# Altium PCB aou_pcb.PcbDoc
Units mm, origin at the board's own origin, x right, y up, seen from the top; angles counter-clockwise.
Board outline 58 x 60 mm, 2 copper layers (Top Layer, Bottom Layer); 57 components, 35 nets, 211 pads, 148 vias.
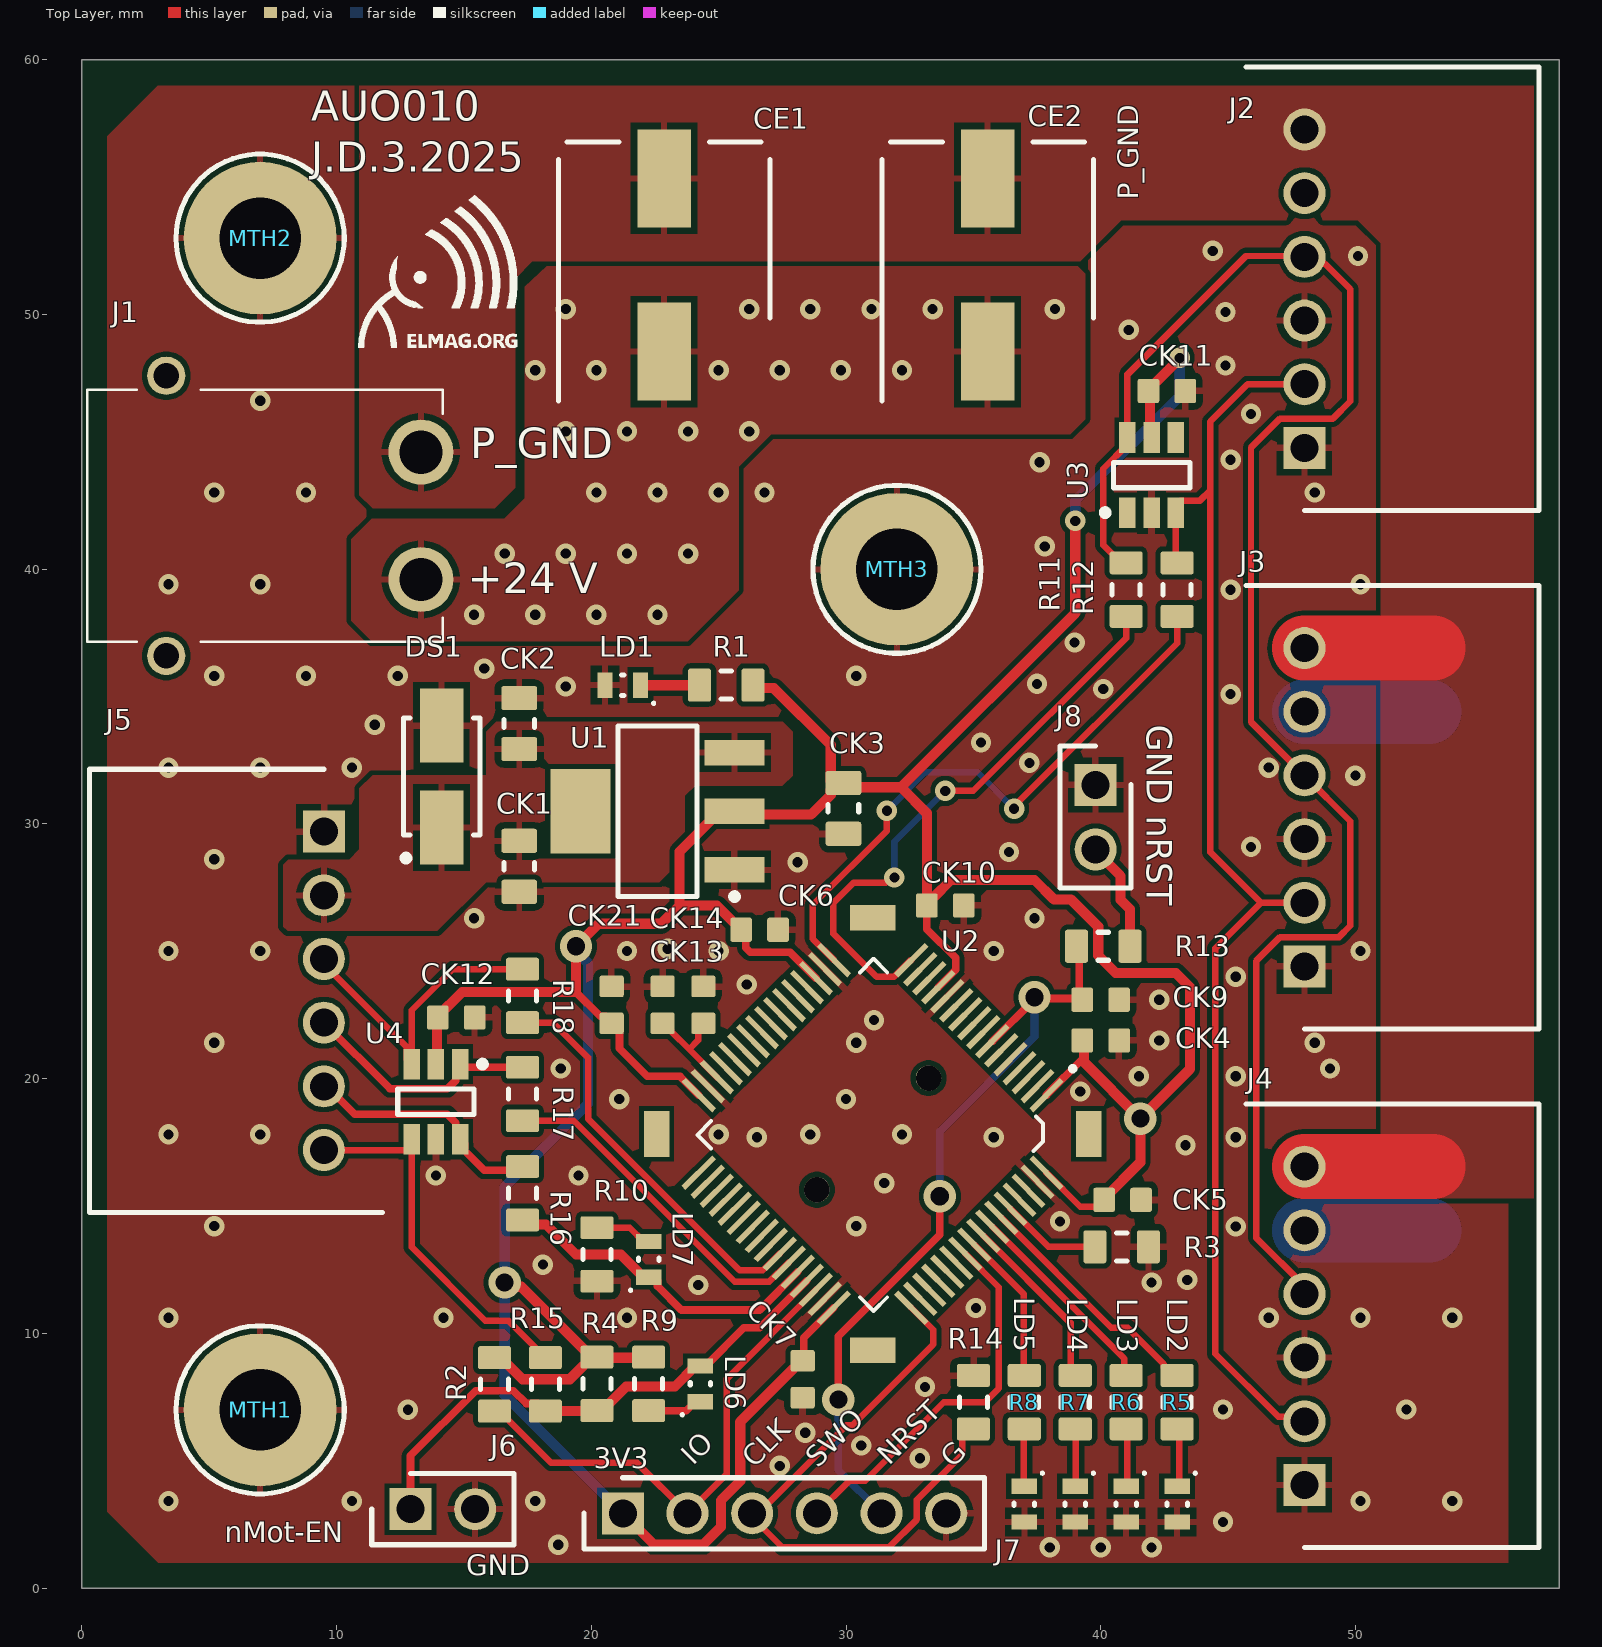
[diagram p0: Top Layer view]
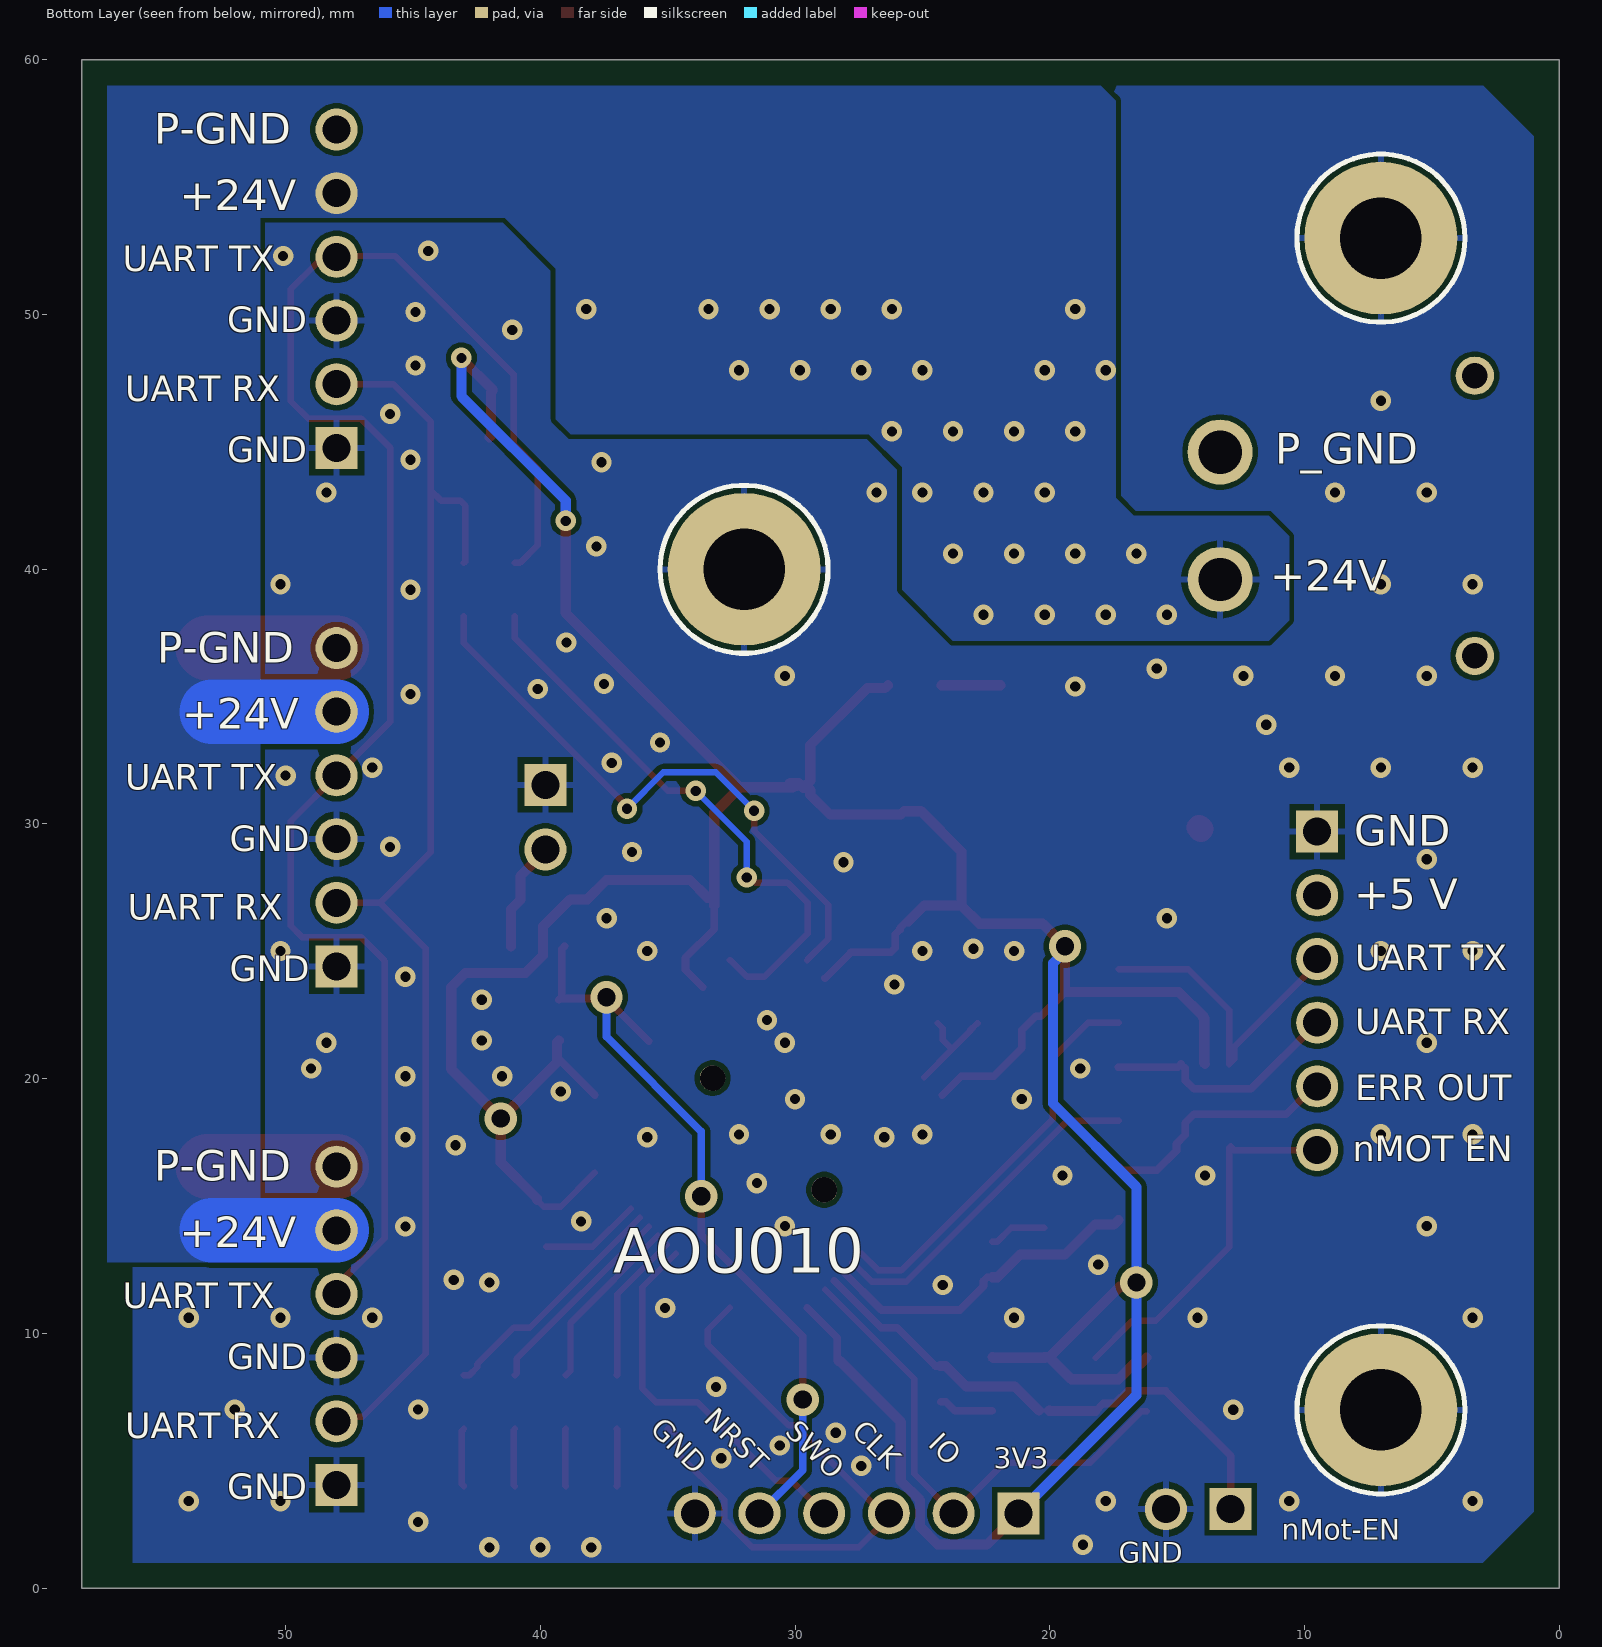
[diagram p1: Bottom Layer view, seen from below]

## Layer stack, top to bottom
Top Solder: solder mask 0.0102, Solder Resist, Dk 3.5
Top Layer: signal copper 0.0356
Dielectric 1: dielectric 0.32, FR-4, Dk 4.8
Bottom Layer: signal copper 0.0356
Bottom Solder: solder mask 0.0102, Solder Resist, Dk 3.5

## Board outline
0,0 0,60 58,60 58,0

## Design rules (kind name [scope] priority, off if disabled: settings)
BoardOutlineClearance [All] p1: gap=1 ignorepadtopadclearanceinfootprint=FALSE
Clearance [All] p1: gap=0.2 ignorepadtopadclearanceinfootprint=FALSE
HoleSize [All] p1: absolutevalues=TRUE maxlimit=4 minlimit=0.025 maxpercent=80.000 minpercent=20.000
PolygonConnect [All] p1: connectstyle=Relief reliefconductorwidth=0.254 reliefentries=4 polygonreliefangle="90 Angle" airgapwidth=0.254
RoutingVias [All] p1: holewidth=0.4 width=0.8 viastyle="Through Hole" minholewidth=0.35 minwidth=0.7 maxholewidth=2 maxwidth=4
SolderMaskExpansion [All] p1: expansion=0.102 istentingtop=FALSE
SupplyNets "Schematic Supply Nets_4" [InNet('P_GND')] p1: voltage=0.000
SupplyNets "Schematic Supply Nets_3" [InNet('+24V')] p2: voltage=0.000
SupplyNets "Schematic Supply Nets_2" [InNet('3V3')] p3: voltage=0.000
SupplyNets "Schematic Supply Nets_1" [InNet('+5')] p4: voltage=0.000
SupplyNets "Schematic Supply Nets" [InNet('GND')] p5: voltage=0.000
Width [All] p1: maxlimit=2.54 minlimit=0.254 preferedwidth=0.254
29 further rules are at their usual default settings.

## Components (designator, comment, footprint, x,y, rotation, side; value= is the part's Value field where it differs from the comment)
CE1 "100u" CAPAE830X1100N 22.86,51.943 r90 top
CE2 "100u" CAPAE830X1100N 35.56,51.943 r90 top
CK1 "10u" CAP0805 17.172,28.339 r270 top
CK2 "10u" CAP0805 17.172,33.943 r90 top
CK3 "10u" CAP0805 29.9,30.615 r270 top
CK4 "100n" CAP0603 40,21.5 r0 top
CK5 "100n" CAP0603 40.858,15.244 r0 top
CK6 "100n" CAP0603 26.607,25.849 r0 top
CK7 "100n" CAP0603 28.3,8.2 r270 top
CK9 "2u2" CAP0603 40,23.1 r0 top
CK10 "100n" CAP0603 33.9,26.8 r0 top
CK11 "100n" CAP0603 42.6,47 r0 top
CK12 "100n" CAP0603 14.7,22.4 r0 top
CK13 "2u2" CAP0603 24.4,22.9 r90 top
CK14 "2u2" CAP0603 22.8,22.9 r270 top
CK21 "100n" CAP0603 20.8,22.9 r90 top
DS1 "B230A" DIOM4326X23M 14.124,31.863 r90 top
J1 "XT30PW-M" XT30PWM 7.4,42.1 r90 top
J2 "JST-XH-6" JST-XH-6 53,51.015 r270 top
J3 "JST-XH-6" JST-XH-6 53,30.657 r270 top
J4 "JST-XH-6" JST-XH-6 53,10.3 r270 top
J5 "JST-XH-6" JST-XH-6 4.5,23.45 r90 top
J6 "Header 2p" "Pin header 2p" 12.9,3.1 r0 top
J7 "Header 6p" "Pin header 6p" 21.236,2.939 r0 top
J8 "Header 2p" "Pin header 2p" 39.8,31.54 r270 top
LD1 "G" 0603_LED_G 21.236,35.451 r180 top
LD2 "Y" 0603_LED_Y 43,3.3 r270 top
LD3 "B" 0603_LED_B 41,3.3 r270 top
LD4 "G" 0603_LED_G 39,3.3 r270 top
LD5 "R" 0603_LED_R 37,3.3 r270 top
LD6 "G" 0603_LED_G 24.284,8.019 r90 top
LD7 "R" 0603_LED_R 22.252,12.907 r90 top
MTH1 "Hole" "3.2/6 MM" 7,7 r0 top
MTH2 "Hole" "3.2/6 MM" 7,53 r0 top
MTH3 "Hole" "3.2/6 MM" 32,40 r0 top
R1 "1k" RESC2012X06N(SMR0805) 25.3,35.451 r180 top
R2 "10k" RESC2012X06N(SMR0805) 16.2,8 r90 top
R3 "10k" RESC2012X06N(SMR0805) 40.822,13.4 r180 top
R4 "10k" RESC2012X06N(SMR0805) 20.22,8.019 r90 top
R5 "1k" RESC2012X06N(SMR0805) 43,7.3 r270 top
R6 "1k" RESC2012X06N(SMR0805) 41,7.3 r270 top
R7 "1k" RESC2012X06N(SMR0805) 39,7.3 r270 top
R8 "1k" RESC2012X06N(SMR0805) 37,7.3 r270 top
R9 "1k" RESC2012X06N(SMR0805) 22.252,8.019 r270 top
R10 "1k" RESC2012X06N(SMR0805) 20.22,13.099 r270 top
R11 "100R" RESC2012X06N(SMR0805) 41,39.2 r90 top
R12 "100R" RESC2012X06N(SMR0805) 43,39.2 r90 top
R13 "100R" RESC2012X06N(SMR0805) 40.1,25.2 r0 top
R14 "10k" RESC2012X06N(SMR0805) 35,7.3 r270 top
R15 "100R" RESC2012X06N(SMR0805) 18.2,8 r270 top
R16 "100R" RESC2012X06N(SMR0805) 17.3,15.5 r270 top
R17 "100R" RESC2012X06N(SMR0805) 17.3,19.4 r270 top
R18 "100R" RESC2012X06N(SMR0805) 17.3,23.25 r270 top
U1 "AMS1117-3.3" SOT230P700X180-4M 22.6,30.5 r180 top
U2 "STM32F401RCT6" LQFP64 31.048,17.831 r135 top locked
U3 "USBLC6-4SC6" SOT23-6 42,43.7 r90 top
U4 "USBLC6-4SC6" SOT23-6 13.9,19.1 r270 top

## Footprints (in the part's own frame and the unit in brackets; to place one, negate y for a bottom-side part, rotate by r counter-clockwise, add the part's x,y. Pads: shape width x height; smd on the part's side, far side on the other; paste and mask are expansions set on the pad)
"3.2/6 MM" [mm]
  round 6 hole 3.2 mask+0.1: 1(0,0)
  silkscreen extent -3.3,-3.3 3.3,3.3, body extent -3,-3 3,3, height 0.1
0603_LED_B [mm] "Chip Diode, 2-Leads, Body 1,60x0,80mm, IPC Low Density"
  rect 0.6x1 smd: 1(-0.7,0) 2(0.7,0)
  silkscreen extent -1.26,-0.4 0.05,0.76, body extent -0.8,-0.4 0.8,0.4, height 0.8
0603_LED_G [mm] "Chip Diode, 2-Leads, Body 1,60x0,80mm, IPC Low Density"
  rect 0.6x1 smd: 1(-0.7,0) 2(0.7,0)
  silkscreen extent -1.26,-0.4 0.05,0.76, body extent -0.8,-0.4 0.8,0.4, height 0.8
0603_LED_R [mm] "Chip Diode, 2-Leads, Body 1,60x0,80mm, IPC Low Density"
  rect 0.6x1 smd: 1(-0.7,0) 2(0.7,0)
  silkscreen extent -1.26,-0.4 0.05,0.76, body extent -0.8,-0.4 0.8,0.4, height 0.8
0603_LED_Y [mm] "Chip Diode, 2-Leads, Body 1,60x0,80mm, IPC Low Density"
  rect 0.6x1 smd: 1(-0.7,0) 2(0.7,0)
  silkscreen extent -1.26,-0.4 0.05,0.76, body extent -0.8,-0.4 0.8,0.4, height 0.8
CAP0603 [mm]
  rrect20% 0.85x0.95 smd: 1(-0.725,0) 2(0.725,0)
  body extent -0.85,-0.45 0.85,0.45, height 0.9
CAP0805 [mm]
  rrect20% 0.95x1.4 smd: 1(-1,0) 2(1,0)
  silkscreen extent -0.15,-0.6 0.15,0.6, body extent -1.05,-0.67 1.05,0.67, height 1.45
CAPAE830X1100N [mm]
  rect 3.85x2.1 smd: 1(-3.4,0) 2(3.4,0)
  silkscreen extent -5.33,-4.15 4.83,4.15, body extent -4.6,-4.25 4.6,4.25, height 11
DIOM4326X23M [mm] "Molded Diode, 2-Leads, Body 4,30x2,61mm, IPC Low Density"
  rect 2.9x1.7 smd: 1(-2,0) 2(2,0)
  silkscreen extent -3.32,-1.5 2.3,1.52, body extent -2.52,-1.46 2.52,1.46, height 2.3
JST-XH-6 [mm]
  rect 1.65x1.65 hole 1.1: 1(6.25,-5)
  round 1.65 hole 1.1: 2(3.75,-5) 3(1.25,-5) 4(-1.25,-5) 5(-3.75,-5) 6(-6.25,-5)
  silkscreen extent -8.7,-7.3 8.7,4.2, body extent -10.02,-5.9 9.98,4.3, height 6
LQFP64 [mm]
  rect 1x1.8 smd rot 135: 0(-6,6) 0(6,-6)
  rect 1x1.8 smd rot 45: 0(-6,-6) 0(6,6)
  round 1 hole 1 unplated: 0(0,3.1) 0(0,-3.1)
  rect 0.22x1.7 smd: 1(-3.747,-5.901) 2(-3.247,-5.901) 3(-2.747,-5.901) 4(-2.247,-5.901) 5(-1.747,-5.901) 6(-1.247,-5.901) 7(-0.747,-5.901) 8(-0.247,-5.901) 9(0.253,-5.901) 10(0.753,-5.901) 11(1.253,-5.901) 12(1.753,-5.901) 13(2.253,-5.901) 14(2.753,-5.901) 15(3.253,-5.901) 16(3.753,-5.901) 33(3.753,5.902) 34(3.253,5.902) 35(2.753,5.902) 36(2.253,5.902) 37(1.753,5.902) 38(1.253,5.902) 39(0.753,5.902) 40(0.253,5.902) 41(-0.247,5.902) 42(-0.747,5.902) 43(-1.247,5.902) 44(-1.747,5.902) 45(-2.247,5.902) 46(-2.747,5.902) 47(-3.247,5.902) 48(-3.746,5.901)
  rect 1.7x0.22 smd: 17(5.901,-3.753) 18(5.901,-3.253) 19(5.901,-2.753) 20(5.901,-2.253) 21(5.901,-1.753) 22(5.901,-1.253) 23(5.901,-0.753) 24(5.901,-0.253) 25(5.901,0.247) 26(5.901,0.747) 27(5.901,1.247) 28(5.901,1.747) 29(5.901,2.247) 30(5.901,2.747) 31(5.901,3.247) 32(5.901,3.747) 49(-5.902,3.753) 50(-5.902,3.253) 51(-5.902,2.753) 52(-5.902,2.253) 53(-5.902,1.753) 54(-5.902,1.253) 55(-5.902,0.753) 56(-5.902,0.253) 57(-5.902,-0.247) 58(-5.902,-0.747) 59(-5.902,-1.247) 60(-5.902,-1.747) 61(-5.902,-2.247) 62(-5.902,-2.746) 63(-5.902,-3.246) 64(-5.902,-3.746)
  silkscreen extent -4.94,-7.42 4.84,4.89, body extent -6.07,-6.07 6.07,6.07, height 1.6
"Pin header 2p" [mm]
  rect 1.65x1.65 hole 1.1: 1(0,0)
  round 1.65 hole 1.1: 2(2.54,0)
  silkscreen extent -1.52,-1.4 4.06,1.4, body extent -1.27,-1.27 3.81,1.27, height 8.61
"Pin header 6p" [mm]
  rect 1.65x1.65 hole 1.1: 1(0,0)
  round 1.65 hole 1.1: 2(2.54,0) 3(5.08,0) 4(7.62,0) 5(10.16,0) 6(12.7,0)
  silkscreen extent -1.52,-1.4 14.2,1.4, body extent -1.27,-1.27 13.97,1.27, height 8.89
RESC2012X06N(SMR0805) [mm] "Chip Resistor, 2-Leads, Body 2,00x1,25mm, IPC Medium Density"
  rrect20% 0.9x1.3 smd: 1(-1.05,0) 2(1.05,0)
  silkscreen extent -0.2,-0.55 0.2,0.55, body extent -1.1,-0.7 1.1,0.7, height 0.6
SOT23-6 [mm] "SOT23, 6-Leads, Body 2,90x2,80mm, Pitch 0,95mm, IPC Low Density"
  rect 1.2x0.65 smd: 1(-1.475,0.95) 2(-1.475,0) 3(-1.475,-0.95) 4(1.475,-0.95) 5(1.475,0) 6(1.475,0.95)
  silkscreen extent -1.6,-1.5 0.5,1.95, body extent -1.6,-1.5 1.6,1.5, height 1.45
SOT230P700X180-4M [mm] "SOT223, 4-Leads, Body 6,50x7,00mm (avg), Pitch 2,30mm, IPC Low Density"
  rect 2.35x1 smd: 1(-3.025,2.3) 2(-3.025,0) 3(-3.025,-2.3)
  rect 2.35x3.3 smd: 4(3.025,0)
  silkscreen extent -3.15,-3.35 1.55,3.47, body extent -3.5,-3.35 3.5,3.35, height 1.8
XT30PWM [mm]
  round 2.55 hole 1.7: 1(2.5,-5.912) 2(-2.5,-5.912)
  round 1.5 hole 1: 3(5.5,4.088) 4(-5.5,4.088)
  silkscreen extent -4.95,-6.76 4.95,7.19, body extent -6.65,-6.71 6.65,7.24, height 5.06

## Part data
CE1 CE2: library part "Cap el 100u 50V", "100uF 50V ±20% SMD,D8xL10.2mm Aluminum Electrolytic Capacitors - SMD ROHS", JLCPCB Part=C3352, Voltage rating=50V, Basic=No, TME Part=CK1H107M08010VR
CK1 CK2 CK3: library part "Cap 10u 0805", "25V 10uF X5R ±10% 0805 Multilayer Ceramic Capacitors MLCC - SMD/SMT ROHS", JLCPCB Part=C15850, Voltage rating=25V, Basic=Yes
CK4 CK5 CK6 CK7 CK10 CK11 CK12 CK21: library part "Cap 100n 0603", "50V 100nF X7R ±10% 0603 Multilayer Ceramic Capacitors MLCC - SMD/SMT ROHS", JLCPCB Part=C14663, Voltage rating=50V, Basic=Yes
CK9 CK13 CK14: library part "Cap 2u2 0603", "16V 2.2uF X5R ±10% 0603 Multilayer Ceramic Capacitors MLCC - SMD/SMT ROHS", JLCPCB Part=C23630, Voltage rating=16V, Basic=Yes
DS1: library part B230A-13-F, "30V 500mV@2A 2A SMA(DO-214AC) Schottky Diodes ROHS", JLCPCB Part=C12889
J1: library part "XT30 male", "plug", Current=15A, JLCPCB Part=C431092, Basic=No, ComponentLink1Description="New link", ComponentLink1URL=https://www.tme.eu/cz/details/xt30pw-m/konektory-dc/amass/
J2 J3 J4 J5: library part JST-HX-6, "1x6P 6P XH Tin 6 -25℃~+85℃ 3A 1 2.5mm Brass Bend insert Push-Pull,P=2.5mm Wire To Board Connector ROHS; S6B-XH-A(LF)(SN)", JLCPCB Part=C157919
J6 J8: library part "Pin header 2p", "Connector", JLCPCB Part=C492401, Manufacturer_Name=Connfly, Manufacturer_Part_Number=DS1021-1*2SF11-B, Basic=No, Datasheet Link=https://www.tme.com/Document/cc301e58a5da78cb543a94b5a5b7f06a/DS1021.pdf, Height=5.88mm
J7: library part "Pin header 6p", "3A Direct Insert Policy 6P -40℃~+105℃ 2.54mm Single Row Black Brass 1x6P Plugin,P=2.54mm Pin Headers ROHS", JLCPCB Part=C37208, Manufacturer_Name=Connfly, Manufacturer_Part_Number=DS1021-1*2SF11-B, Datasheet Link=https://www.tme.com/Document/cc301e58a5da78cb543a94b5a5b7f06a/DS1021.pdf, Height=5.88mm
LD1 LD4 LD6: library part "LED G 0603", "0603 Green Led", JLCPCB Part=C22371297
LD2: library part "LED Y 0603", "0603 Yellow Led", JLCPCB Part=C7496811
LD3: library part "LED B 0603", "0603 Blue Led", JLCPCB Part=C7496819
LD5 LD7: library part "LED R 0603", "-40℃~+85℃ Red 0603 LED Indication - Discrete ROHS", JLCPCB Part=C2286
MTH1 MTH2 MTH3: "Universal mounting hole plated"
R1 R5 R6 R7 R8 R9 R10: library part "Res 1k 0805", "125mW Thick Film Resistors 150V ±100ppm/℃ ±1% 1kΩ 0805 Chip Resistor - Surface Mount ROHS", JLCPCB Part=C17513, Package=0805, Tolerance & Rating=1%/0.1W, Author=JP/27.03.2014, Basic=Yes, ComponentLink3Description="rezistor čip", ComponentLink3URL=heliosgreen://v1/hegMT/5-MT/Classes(343)/Folders/OpenForm?RecordNumbers=[381513], SMD=1
R2 R3 R4 R14: library part "Res 10k 0805", "125mW Thick Film Resistors 150V ±100ppm/℃ ±1% 10kΩ 0805 Chip Resistor - Surface Mount ROHS", JLCPCB Part=C17414, Package=0805, Tolerance & Rating=1%/0.1W, Basic=Yes, ComponentLink3Description="rezistor čip", ComponentLink3URL=heliosgreen://v1/hegMT/5-MT/Classes(343)/Folders/OpenForm?RecordNumbers=[381513], SMD=1
R11 R12 R13 R15 R16 R17 R18: library part "Res 100R 0805", "125mW Thick Film Resistors 150V ±100ppm/℃ ±1% 100Ω 0805 Chip Resistor - Surface Mount ROHS", JLCPCB Part=C17408, Package=0805, Tolerance & Rating=1%/0.1W, Author=JP/27.03.2014, Basic=Yes, ComponentLink3Description="rezistor čip", ComponentLink3URL=heliosgreen://v1/hegMT/5-MT/Classes(343)/Folders/OpenForm?RecordNumbers=[381513], SMD=1
U1: "72dB@(120Hz) 1A Fixed 3.3V Positive electrode SOT-223 Voltage Regulators - Linear, Low Drop Out (LDO) Regulators ROHS", JLCPCB Part=C6186, Basic=Yes
U2: "256KB 1.7V~3.6V ARM-M4 64KB 84MHz FLASH 50 LQFP-64(10x10) Microcontrollers (MCU/MPU/SOC) ROHS", JLCPCB Part=C74524, Basic=No
U3 U4: "5A 17V 6V Unidirectional 5.25V SOT-23-6 ESD and Surge Protection (TVS/ESD) ROHS", JLCPCB Part=C111212, Basic=No

## Via types
v1: diameter 0.8, hole 0.4, Top Layer to Bottom Layer, 142 vias
v2: diameter 1.27, hole 0.711, Top Layer to Bottom Layer, 6 vias

## Nets (pads, with @x,y where several pads share a name; then routed paths per layer and width w, separated by ;. In a path a pad name is that pad's centre, name@x,y a point inside that pad or via, vN(x,y) a via of type N, cw(c..) or ccw(c..) an arc to the next point about the centre after c; other vN are vias at no path point)
3V3: CK3.1 CK4.1 CK5.1 CK6.1 CK7.1 CK10.1 CK11.1 CK12.1 CK21.1 J7.1 R1.1 R2.2 R4.2 R9.1 U1.2 U2.1 U2.13 U2.19 U2.32 U2.48 U2.64 U3.5 U4.2 | length 163.9
  Top Layer w0.254: U2.64 39.199,14.978 39.866,14.978 CK5.1
  Top Layer w0.3: 19.4,23.4 20.35,22.45 20.556,22.45 21.106,21.9 21.106,21.194 22.2,20.1 23.481,20.1 U2.32 ; CK6.1@25.557,26.174 25.607,26.174 25.882,25.899 CK6.1 26.066,25.665 26.066,25.147 26.242,24.971 27.802,24.971 U2.19 ; CK7.1@28.348,8.925 28.348,9.833 U2.48 ; CK10.1 33.175,25.875 34.303,24.747 34.303,24.273 U2.13 ; U2.1 37.87,19.36 39.307,20.797
  Top Layer w0.4: U4.2 13.938,20.613 13.938,22.363 CK12.1 13.975,22.45 14.925,23.4 19.4,23.4 v2(19.4,25.2) 20.281,26.081 22.751,26.081 23.466,26.796 ; R2.2 16.45,8.8 16.7,8.8 17.3,8.2 19.151,8.2 R4.2@20.02,9.069 ; v2(16.6,12) 16.766,11.834 17.255,11.834 R4.2@20.02,9.069 ; R4.2@20.22,9.044 22.227,9.044 R9.1 ; R4.2 R4.2@20.02,9.069 ; J7.1 22.461,1.714 24.399,1.714 25.091,2.406 25.091,3.446 25.851,4.206 25.851,6.526 28.25,8.925 CK7.1 ; CK6.1@25.557,26.174 24.935,26.796 23.466,26.796 ; R1.1 26.467,35.334 27.166,35.334 29.4,33.1 29.4,31.69 CK3.1@29.675,31.415 ; CK3.1 29.875,31.615 CK3.1@29.675,31.415 ; CK3.1@30.076,31.439 32.161,31.439 ; CK10.1 33.175,30.425 32.161,31.439 ; CK10.1@33.428,27.103 34.125,27.8 37.4,27.8 38.161,27.039 38.824,27.039 39.9,25.963 39.9,24.837 40.587,24.15 42.95,24.15 43.5,23.6 43.5,20.377 v2(41.556,18.433) ; v1(39,41.9) 39,38.278 32.161,31.439 ; CK4.1 39.294,21.481 39.307,21.481 39.349,21.439 39.349,20.64 v2(41.556,18.433) ; CK5.1 40.133,15.294 41.556,16.718 v2(41.556,18.433) ; U3.5 41.937,45.237 41.937,46.938 CK11.1 41.875,47.05 43.1,48.275 v1(43.1,48.3) ; 23.466,26.796 23.466,28.915 25.05,30.5 U1.2 25.725,30.5 25.854,30.371 28.631,30.371 29.4,31.14 29.4,31.34 29.475,31.415 CK3.1@29.675,31.415
  Top Layer w0.5: CK3.1@29.95,31.55 CK3.1@30.175,31.55
  Bottom Layer w0.4: v2(19.4,25.2) 19.4,25.006 19.875,24.531 19.875,19.027 16.6,15.752 v2(16.6,12) 16.6,7.575 J7.1 ; v1(39,41.9) 39,42.7 43.1,46.8 v1(43.1,48.3)
+5: CK1.1 CK2.1 DS1.1 J5.2 U1.3 | length 0.1
  Top Layer w1: DS1.1@14.064,29.803 DS1.1
+24V: CE1.1 CE2.1 J1.2 J2.5 J3.5 J4.5 | length 9.8
  Bottom Layer w2.54: J4.5 52.893,14.05 ; J3.5 52.893,34.407
  other v1: 15.4,38.215 17.8,38.215 20.2,38.215 22.6,38.215 16.6,40.615 19,40.615 21.4,40.615 23.8,40.615 20.2,43.015 22.6,43.015 25,43.015 19,45.415 21.4,45.415 23.8,45.415 26.2,45.415 17.8,47.815 20.2,47.815 25,47.815 27.4,47.815 29.8,47.815 32.2,47.815 19,50.215 26.2,50.215 28.6,50.215 31,50.215 33.4,50.215 38.2,50.215
\M\O\T\O\R\_\E\N\A\B\L\E\: J6.1 LD6.2 R4.1 R15.2 U2.45 | length 20.8
  Top Layer w0.3: J6.1 12.9,5.192 15.458,7.75 16.942,7.75 17.442,7.25 17.9,7.25 R15.2 ; LD6.2 24.484,8.719 25.99,10.225 26.619,10.225 U2.45
  Top Layer w0.4: R15.2 18.21,6.96 20.011,6.96 R4.1@20.02,6.969 ; R4.1@20.42,6.969 21.37,7.919 23.284,7.919 24.084,8.719 LD6.2
ERR_OUT: LD7.1 R16.2 U2.44 | length 13
  Top Layer w0.3: LD7.1 22.452,12.207 22.602,12.057 22.602,11.857 23.54,10.919 26.606,10.919 U2.44
  Top Layer w0.4: R16.2 17.473,14.277 18.223,14.277 19.401,13.099 21.16,13.099 22.052,12.207 LD7.1
GND: CK1.2 CK2.2 CK3.2 CK4.2 CK5.2 CK6.2 CK7.2 CK9.2 CK10.2 CK11.2 CK12.2 CK13.2 CK14.1 CK21.2 DS1.2 J2.1 J2.3 J3.1 J3.3 J4.1 J4.3 J5.1 J6.2 J7.6 J8.1 LD1.2 LD2.2 LD3.2 LD4.2 LD5.2 MTH1.1 MTH2.1 MTH3.1 R3.1 R10.2 R14.1 U1.1 U2.12 U2.18 U2.31 U2.47 U2.63 U3.2 U4.5
  other v1: 38,1.6 40,1.6 42,1.6 18.7,1.7 44.8,2.6 3.4,3.415 10.6,3.415 17.8,3.415 50.2,3.415 53.8,3.415 27.4,4.8 32.9,5.1 30.6,5.6 28.4,6.1 12.8,7 44.8,7.015 52,7.015 33.1,7.9 3.4,10.615 14.2,10.615 21.4,10.615 46.6,10.615 50.2,10.615 53.8,10.615 35.1,11 24.2,11.9 42,12 43.4,12.1 18.1,12.7 45.3,14.2 5.2,14.215 30.4,14.215 38.4,14.4 31.5,15.9 13.9,16.2 19.5,16.2 43.327,17.386 26.5,17.7 35.8,17.7 45.3,17.7 3.4,17.815 7,17.815 25,17.815 28.6,17.815 32.2,17.815 21.1,19.2 30,19.2 39.2,19.5 41.5,20.1 45.3,20.1 18.8,20.4 49,20.4 5.2,21.415 30.4,21.415 48.4,21.415 42.3,21.5 31.1,22.3 42.3,23.1 26.1,23.7 45.3,24 3.4,25.015 7,25.015 21.4,25.015 25,25.015 35.8,25.015 50.2,25.015 23,25.1 15.4,26.3 37.4,26.3 28.1,28.5 5.2,28.615 36.4,28.9 45.9,29.1 50,31.9 3.4,32.215 7,32.215 10.6,32.215 46.6,32.215 37.2,32.4 35.3,33.2 11.5,33.9 45.1,35.1 40.1,35.3 19,35.4 37.5,35.5 5.2,35.815 8.8,35.815 12.4,35.815 30.4,35.815 15.8,36.1 38.976,37.124 45.1,39.2 3.4,39.415 7,39.415 50.2,39.415 37.8,40.9 5.2,43.015 8.8,43.015 26.8,43.015 48.4,43.015 37.6,44.2 45.1,44.3 45.9,46.1 7,46.615 44.9,48 41.1,49.4 44.9,50.1 50.1,52.3 44.4,52.5
MCU_NRST: CK9.1 J7.5 R13.1 U2.7 | length 30.7
  Top Layer w0.3: v2(29.7,7.4) 29.7,9.893 33.682,13.875 v2(33.682,15.385) ; U2.7 37.4,23.127 v2(37.4,23.2) 37.45,23.15 39.225,23.15 CK9.1 39.162,23.212 39.162,25.088 R13.1
  Bottom Layer w0.3: v2(29.7,7.4) 29.7,4.635 J7.5 ; v2(33.682,15.385) 33.682,17.925 37.4,21.643 v2(37.4,23.2)
MCU_SWO: J7.4 U2.55 | length 15
  Top Layer w0.254: J7.4 30.136,4.219 30.751,4.219 33.832,7.3 35.46,7.3 36,7.84 36,11.813 U2.55
NetCK13_1: CK13.1 CK14.2 U2.30 | length 4.3
  Top Layer w0.254: CK14.2@22.82,22.175 22.85,22.175 23.148,21.877 23.148,21.847 23.841,21.154 ; CK13.1 24.205,21.98 24.205,21.518 23.841,21.154 ; U2.30 23.841,21.154
NetJ2_2: J2.2 J3.2 J4.2 R12.2 U3.3 | length 52.6
  Top Layer w0.254: R12.2 42.95,40.3 U3.3 42.95,42.5 43.148,42.698 43.898,42.698 44.3,43.1 ; J4.2 47.826,6.724 46.976,6.724 44.5,9.2 44.5,25.115 46.293,26.907 ; J3.2 46.293,26.907 ; J2.2 45.765,47.265 44.3,45.8 44.3,43.1 ; 44.3,43.1 44.3,28.9 46.293,26.907
NetJ2_4: J2.4 J3.4 J4.4 R11.2 U3.6 | length 67.1
  Top Layer w0.254: R11.2 40.8,40.25 40.1,40.95 40.1,43.95 41.05,44.9 U3.6 41.05,47.65 45.7,52.3 47.965,52.3 J2.4 48.267,51.998 48.802,51.998 49.8,51 49.8,46.6 49.117,45.917 47.04,45.917 45.9,44.777 45.9,34.007 J3.4 49.8,30.107 49.8,26 49.359,25.559 47.04,25.559 46.1,24.62 46.1,13.76 48,11.86 J4.4
NetJ5_3: J5.3 R18.1 U4.3 | length 12.7
  Top Layer w0.254: J5.3 9.5,24.5 12.752,21.248 12.752,20.773 U4.3 12.95,22.688 14.562,24.3 R18.1
NetJ5_4: J5.4 R17.1 U4.1 | length 9.6
  Top Layer w0.3: J5.4 12.1,19.6 14.345,19.6 14.675,19.93 14.675,20.4 U4.1 14.975,20.45 R17.1
NetJ5_5: J5.5 R16.1 U4.6 | length 9.7
  Top Layer w0.3: J5.5 9.615,19.7 10.715,18.6 14.345,18.6 14.675,18.27 14.675,17.8 15.025,17.45 15.025,17.175 15.8,16.4 17.15,16.4 R16.1
NetJ5_6: J5.6 R15.1 U4.4 | length 14.4
  Top Layer w0.254: J5.6 12.752,17.2 U4.4@12.898,17.346 ; U4.4@12.95,17.294 12.95,13.39 15.84,10.5 16.75,10.5 R15.1
NetJ8_2: J8.2 R13.2 | length 4.4
  Top Layer w0.4: J8.2 39.8,28.938 40.777,27.961 40.777,27.023 41.15,26.65 R13.2
NetLD1_1: LD1.1 R1.2 | length 2.3
  Top Layer w0.4: LD1.1 R1.2
NetLD2_1: LD2.1 R5.2 | length 2.3
  Top Layer w0.254: LD2.1 43.08,4.08 43.08,6.17 R5.2
NetLD3_1: LD3.1 R6.2 | length 2.3
  Top Layer w0.254: LD3.1 41.048,4.048 41.048,6.202 R6.2
NetLD4_1: LD4.1 R7.2 | length 2.3
  Top Layer w0.254: LD4.1 39.016,4.016 39.016,6.234 R7.2
NetLD5_1: LD5.1 R8.2 | length 2.3
  Top Layer w0.254: LD5.1 36.984,4.016 36.984,6.234 R8.2
NetLD6_1: LD6.1 R9.2 | length 2.2
  Top Layer w0.3: R9.2 23.734,6.969 24.084,7.319 LD6.1
NetLD7_2: LD7.2 R10.1 | length 2.3
  Top Layer w0.254: R10.1 21.51,14.149 22.052,13.607 LD7.2
NetR3_2: R3.2 U2.60 | length 3.9
  Top Layer w0.254: U2.60 37.949,13.4 R3.2
NetR5_1: R5.1 U2.59 | length 9.5
  Top Layer w0.254: U2.59 40.419,10.223 41.053,10.223 42.408,8.867 42.477,8.799 42.477,8.673 42.8,8.35 R5.1
NetR6_1: R6.1 U2.58 | length 8
  Top Layer w0.254: U2.58 40.924,9.011 40.924,8.426 R6.1
NetR7_1: R7.1 U2.57 | length 7
  Top Layer w0.254: U2.57 38.816,10.412 38.816,8.534 R7.1
NetR8_1: R8.1 U2.56 | length 5.9
  Top Layer w0.254: U2.56 36.984,11.537 36.984,8.366 R8.1
P_GND: CE1.2 CE2.2 J1.1 J2.6 J3.6 J4.6 | length 10.1
  Top Layer w2.54: J4.6 53.05,16.55 ; J3.6 53.05,36.907
SWDCLK: J7.3 R14.2 U2.49 | length 23.8
  Top Layer w0.254: U2.49 33.428,10.143 33.428,9.567 30.247,6.387 30.015,6.387 26.567,2.939 J7.3 26.316,2.784 27.5,1.6 31.686,1.6 32.784,2.698 32.784,3.466 34.567,5.249 34.567,5.927 34.89,6.25 R14.2
SWDIO: J7.2 R2.1 U2.46 | length 20.1
  Top Layer w0.254: R2.1 16.4,6.95 18.433,4.917 21.798,4.917 J7.2 25.324,4.487 25.324,8.223 U2.46
USART1_RX: R17.2 U2.43 | length 13.4
  Top Layer w0.254: R17.2 19.308,18.35 25.634,12.024 26.98,12.024 27.732,12.777 U2.43
USART1_TX: R18.2 U2.42 | length 15.8
  Top Layer w0.254: R18.2 18.5,22.2 19.875,20.825 19.875,18.425 25.822,12.478 26.727,12.478 27.379,13.13 U2.42
USART2_RX: R12.1 U2.17 | length 23.8
  Top Layer w0.254: U2.17 28.7,25.487 28.7,26.833 31.606,29.739 v1(31.606,30.519) ; v1(36.6,30.6) 36.6,30.7 43,37.1 R12.1
  Bottom Layer w0.254: v1(31.606,30.519) 33.114,32.027 35.173,32.027 v1(36.6,30.6)
USART2_TX: R11.1 U2.16 | length 22.7
  Top Layer w0.254: v1(31.9,27.9) 31.752,27.9 31.552,27.7 30.3,27.7 29.5,26.9 29.5,25.7 31.2,24 31.885,24 32.543,24.658 U2.16 ; v1(33.9,31.3) 35,31.3 41,37.3 R11.1
  Bottom Layer w0.254: v1(31.9,27.9) 31.9,29.3 v1(33.9,31.3)
pads on no net: J1.3 J1.4 U1.4 U2.0 U2.2 U2.3 U2.4 U2.5 U2.6 U2.8 U2.9 U2.10 U2.11 U2.14 U2.15 U2.20 U2.21 U2.22 U2.23 U2.24 U2.25 U2.26 U2.27 U2.28 U2.29 U2.33 U2.34 U2.35 U2.36 U2.37 U2.38 U2.39 U2.40 U2.41 U2.50 U2.51 U2.52 U2.53 U2.54 U2.61 U2.62 U3.1 U3.4

## Polygon pours and split planes (outlines as drawn)
GND on Top Layer "GND_L01_P006" (solid, remove dead copper, pour order 6): 3.093,59.1 56,59.1 56,1 3,1 1,3 1,57.007
+24V on Top Layer "+24V_L01_P001" (solid, pour order 1): 17.384,51.084 18.284,51.927 39.073,51.927 39.4,51.6 39.4,45.9 38.8,45.3 27.061,45.3 25.784,44.023 25.784,39.184 23.784,37.184 11.384,37.184 10.584,37.984 10.584,41.184 11.384,41.984 16.584,41.984 17.384,42.784
P_GND on Top Layer "P_GND_L01_P000" (solid, pour order 0): 39.2,52.1 40.8,53.7 50.1,53.7 51,52.8 51,15.3 57,15.3 57,59.1 10.9,59.1 10.9,42.912 11.412,42.4 16.212,42.4 17.012,43.2 17.012,51.4 17.681,52.1
+5 on Top Layer "+5_L01_P004" (solid, pour order 4): 23.675,31.1 24.075,31.5 27.5,31.5 27.9,31.9 27.9,33.63 27.515,34.015 16.275,34.015 15.875,33.615 15.875,31.915 11.415,31.915 10.9,31.4 10.9,29 10.5,28.6 8.1,28.6 7.9,28.4 7.9,25.975 8.075,25.8 13.96,25.8 15.875,27.715 22.675,27.715 23.675,28.715
GND on Bottom Layer "GND_L02_P005" (solid, pour order 5): 3.093,59.1 56,59.1 56,1 3,1 1,3 1,57.007
+24V on Bottom Layer "+24V_L02_P002" (solid, pour order 2): 23.8,37.2 25.8,39.2 25.8,44 27.1,45.3 38.8,45.3 39.4,45.9 39.399,51.799 41.4,53.8 51,53.8 51,12.8 57,12.8 57,59.1 18.1,59.1 17.4,58.4 17.4,42.8 16.7,42.1 11.4,42.1 10.6,41.3 10.6,38 11.4,37.2
no net on Top Solder "NONET_L01_P-001" (solid): 41.9,58.4 44.6,58.4 44.6,54.3 41.9,54.3

## Silkscreen, mask and mechanical layers (free items; w line width, h text height)
Top Overlay:
  drawing of 16 lines, arcs and shapes, not listed
  text "AUO010 / J.D.3.2025" at 9,55.215 h2
  text "P_GND" at 41.467,54.5 h0.8 r90
  text "P_GND" at 15.25,44.35 h1.2
  text "+24 V" at 15.15,39.05 h1.2
  text "GND nRST" at 41.8,33.9 h1 r270
  text "IO" at 24,4.783 h0.8 r45
  text "NRST" at 31.7,4.783 h0.8 r45
  text "3V3" at 20.1,4.7 h0.8
  text "CLK" at 26.4,4.683 h0.8 r45
  text "SWO" at 28.9,4.683 h0.8 r45
  text "G" at 34.2,4.683 h0.8 r45
  text "nMot-EN" at 5.6,1.8 h0.8
  text "GND" at 15.1,0.5 h0.8
Bottom Overlay:
  text "P-GND" at 55.15,56.7 h1.2
  text "+24V" at 54.15,54.1 h1.2
  text "UART TX" at 56.4,51.7 h1
  text "GND" at 52.3,49.3 h1
  text "UART RX" at 56.3,46.6 h1
  text "GND" at 52.3,44.2 h1
  text "P_GND" at 11.15,44.15 h1.2
  text "+24V" at 11.35,39.15 h1.2
  text "P-GND" at 55.05,36.335 h1.2
  text "+24V" at 54.05,33.735 h1.2
  text "UART TX" at 56.3,31.335 h1
  text "GND" at 8.049,29.15 h1.2
  text "GND" at 52.2,28.935 h1
  text "+5 V" at 8.049,26.65 h1.2
  text "UART RX" at 56.2,26.235 h1
  text "UART TX" at 8.015,24.25 h1
  text "GND" at 52.2,23.835 h1
  text "UART RX" at 8.015,21.75 h1
  text "ERR OUT" at 8.015,19.15 h1
  text "nMOT EN" at 8.115,16.75 h1
  text "P-GND" at 55.15,15.985 h1.2
  text "+24V" at 54.15,13.385 h1.2
  text "AOU010" at 37.138,11.8 h3
  text "UART TX" at 56.4,10.985 h1
  text "GND" at 52.3,8.585 h1
  text "NRST" at 33.617,6.6 h0.8 r45
  text "GND" at 35.717,6.2 h0.8 r45
  text "CLK" at 27.817,6.1 h0.8 r45
  text "SWO" at 30.417,6.1 h0.8 r45
  text "UART RX" at 56.3,5.885 h1
  text "IO" at 24.817,5.6 h0.8 r45
  text "3V3" at 22.2,4.7 h0.8
  text "GND" at 52.3,3.485 h1
  text "nMot-EN" at 10.9,1.9 h0.8
  text "GND" at 17.3,1 h0.8
Panel Shape:
  the board outline again, w0.254